# Altium PCB UART_Translator.PcbDoc
Units mm, origin at the board's own origin, x right, y up, seen from the top; angles counter-clockwise.
Board outline 5 x 6 mm, 2 copper layers (Top Layer, Bottom Layer); 5 components, 4 nets, 10 pads, 2 vias.
Unrouted connection lines stored in the file: 2.
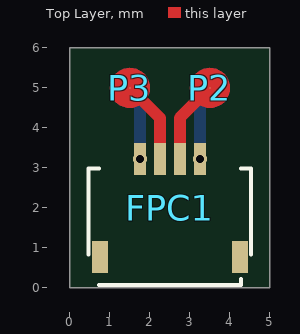
[diagram p0: Top Layer view]
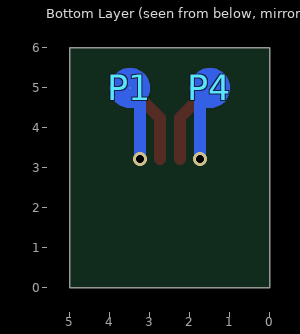
[diagram p1: Bottom Layer view, seen from below]

## Layer stack, top to bottom
Top Solder: solder mask 0.0102, Solder Resist, Dk 3.5
Top Layer: signal copper 0.0356
Dielectric 1: dielectric 0.32, FR-4, Dk 4.8
Bottom Layer: signal copper 0.0356
Bottom Solder: solder mask 0.0102, Solder Resist, Dk 3.5

## Board outline
0,0 0,6 5,6 5,0

## Design rules (kind name [scope] priority, off if disabled: settings)
Clearance Clearance_1 [OnMid vs OnMid] p1: gap=0.15 ignorepadtopadclearanceinfootprint=FALSE sourcerule=35 cellrowname=All cellrowtype=0 cellcolname=All cellcoltype=0 innerlayers=TRUE
Clearance Clearance_2 [(ExistsOnLayer('Top Layer') Or ExistsOnLayer('Bottom Layer')) vs (ExistsOnLayer('Top Layer') Or ExistsOnLayer('Bottom Layer'))] p2: gap=0.15 ignorepadtopadclearanceinfootprint=FALSE sourcerule=35 cellrowname=All cellrowtype=0 cellcolname=All cellcoltype=0 outerlayers=TRUE
Clearance [All] p3: gap=0.254 ignorepadtopadclearanceinfootprint=FALSE ismatrix=TRUE
PolygonConnect [All] p1: connectstyle=Relief reliefconductorwidth=0.254 reliefentries=4 polygonreliefangle="90 Angle" airgapwidth=0.254
RoutingVias [All] p1: holewidth=0.711 width=1.27 viastyle="Through Hole" minholewidth=0.711 minwidth=1.27 maxholewidth=0.711 maxwidth=1.27
SolderMaskExpansion [All] p1: expansion=0.102 istentingtop=FALSE
Width [All] p1: maxlimit=5 minlimit=0.15 preferedwidth=0.15 minimp=50.000000 maximp=50.000000 favimp=50.000000
29 further rules are at their usual default settings.

## Components (designator, comment, footprint, x,y, rotation, side; value= is the part's Value field where it differs from the comment)
FPC1 "FH34SRJ-4S-0.5SH(50)" FFC-SMD_4P-P0.50_FH34SRJ-4S-0.5SH 2.5,2 r0 top
P1 "BurnPad" BURNPAD_1.0MM#1 3.5,5 r0 top
P2 "BurnPad" BURNPAD_1.0MM#2 3.6,4.9 r0 top
P3 "BurnPad" BURNPAD_1.0MM#3 1.3,5 r0 top
P4 "BurnPad" BURNPAD_1.0MM#1 1.5,5 r0 top

## Footprints (in the part's own frame and the unit in brackets; to place one, negate y for a bottom-side part, rotate by r counter-clockwise, add the part's x,y. Pads: shape width x height; smd on the part's side, far side on the other; paste and mask are expansions set on the pad)
BURNPAD_1.0MM#1 [mil]
  round 1 smd far side mask+1.97: 1(0,0)
  Bottom Layer region: 0,-19.68 -7.53,-18.19 -13.92,-13.92 -18.19,-7.53 -19.69,0 -19.68,0 -18.19,7.53 -13.92,13.92 -7.53,18.19 0,19.68 0,19.68 7.53,18.19 13.92,13.92 18.19,7.53 19.69,0 19.69,0 18.19,-7.53 13.92,-13.92 7.53,-18.19 0,-19.68
BURNPAD_1.0MM#2 [mil]
  round 1 smd mask+1.97: 1(-3.94,3.94)
  Top Layer region: -3.94,-15.75 -11.47,-14.25 -17.86,-9.98 -22.12,-3.6 -23.62,3.94 -23.62,3.94 -22.12,11.47 -17.86,17.86 -11.47,22.12 -3.94,23.62 -3.94,23.62 3.6,22.12 9.98,17.86 14.25,11.47 15.75,3.94 15.75,3.94 14.25,-3.6 9.98,-9.98 3.6,-14.25 -3.94,-15.75
BURNPAD_1.0MM#3 [mil]
  round 1 smd mask+1.97: 1(7.87,0)
  Top Layer region: 7.87,-19.68 0.34,-18.19 -6.05,-13.92 -10.31,-7.53 -11.81,0 -11.81,0 -10.31,7.53 -6.05,13.92 0.34,18.19 7.87,19.68 7.87,19.68 15.41,18.19 21.79,13.92 26.06,7.53 27.56,0 27.56,0 26.06,-7.53 21.79,-13.92 15.41,-18.19 7.87,-19.68
FFC-SMD_4P-P0.50_FH34SRJ-4S-0.5SH [mm]
  rect 0.3x0.8 smd: 1(0.75,1.225) 2(0.25,1.225) 3(-0.25,1.225) 4(-0.75,1.225)
  rect 0.4x0.8 smd: 5(-1.75,-1.225) 6(1.75,-1.225)
  silkscreen extent -2.03,-1.93 2.03,0.99, body extent -1.96,-1.95 2.04,1.85, height 1.02

## Part data
FPC1: JLCPCB Part Class="Extended Part", LCSC Part Name="间距:0.5mm P数:4P 双侧触点/上下接", Manufacturer=HRS(广濑), Operating Temperature Range=-55℃~+105℃, Soldering Temperature(Max)=-, Add into BOM=yes, Contact Material=磷青铜, Contact Plating=金, Contact Type=双侧触点/上下接, Convert to PCB=yes, Datasheet=https://atta.szlcsc.com/upload/public/pdf/source/20210303/C596732_A8DFF1AAA7954D31ED084C13292B0B28.pdf, Device=FH34SRJ-4S-0.5SH(50), FFC, FCB Thickness=0.3mm, Height Above Board=1mm, Locking Feature=-, Manufacturer Part=FH34SRJ-4S-0.5SH(50), Mounting Type=卧贴, Number of Contacts=4P, Pitch=0.5mm, Supplier=LCSC, Supplier Footprint=SMD,P=0.5mm,卧贴, Supplier Part=C596732, Symbol=FH34SRJ-4S-0.5SH(50)

## Via types
v1: diameter 0.35, hole 0.2, Top Layer to Bottom Layer, tented both sides, 2 vias

## Nets (pads, with @x,y where several pads share a name; then routed paths per layer and width w, separated by ;. In a path a pad name is that pad's centre, name@x,y a point inside that pad or via, vN(x,y) a via of type N, cw(c..) or ccw(c..) an arc to the next point about the centre after c; other vN are vias at no path point)
GND: FPC1.1 FPC1.5 FPC1.6 P1.1 | length 1.9
  Bottom Layer w0.3: v1(3.25,3.225) 3.25,4.75 P1.1
System_5V: FPC1.4 P4.1 | length 1.9
  Bottom Layer w0.3: P4.1 1.75,4.75 v1(1.75,3.225)
UART4_RX: FPC1.2 P2.1 | length 2.1
  Top Layer w0.3: FPC1.2 2.75,4.25 P2.1
UART4_TX: FPC1.3 P3.1 | length 2.1
  Top Layer w0.3: P3.1 2.25,4.25 FPC1.3

## Silkscreen, mask and mechanical layers (free items; w line width, h text height)
Mechanical 1:
  the board outline again, w0.1